# Altium PCB bidirectional_audio_v4.1.PcbDoc
Units mil, origin at the board's own origin, x right, y up, seen from the top; angles counter-clockwise.
Board outline 1710.78 x 3107.8 mil, 4 copper layers (Top Layer, Mid-Layer 1, Mid-Layer 2, Bottom Layer), stack 57.4 mil thick; 106 components, 76 nets, 313 pads, 214 vias.
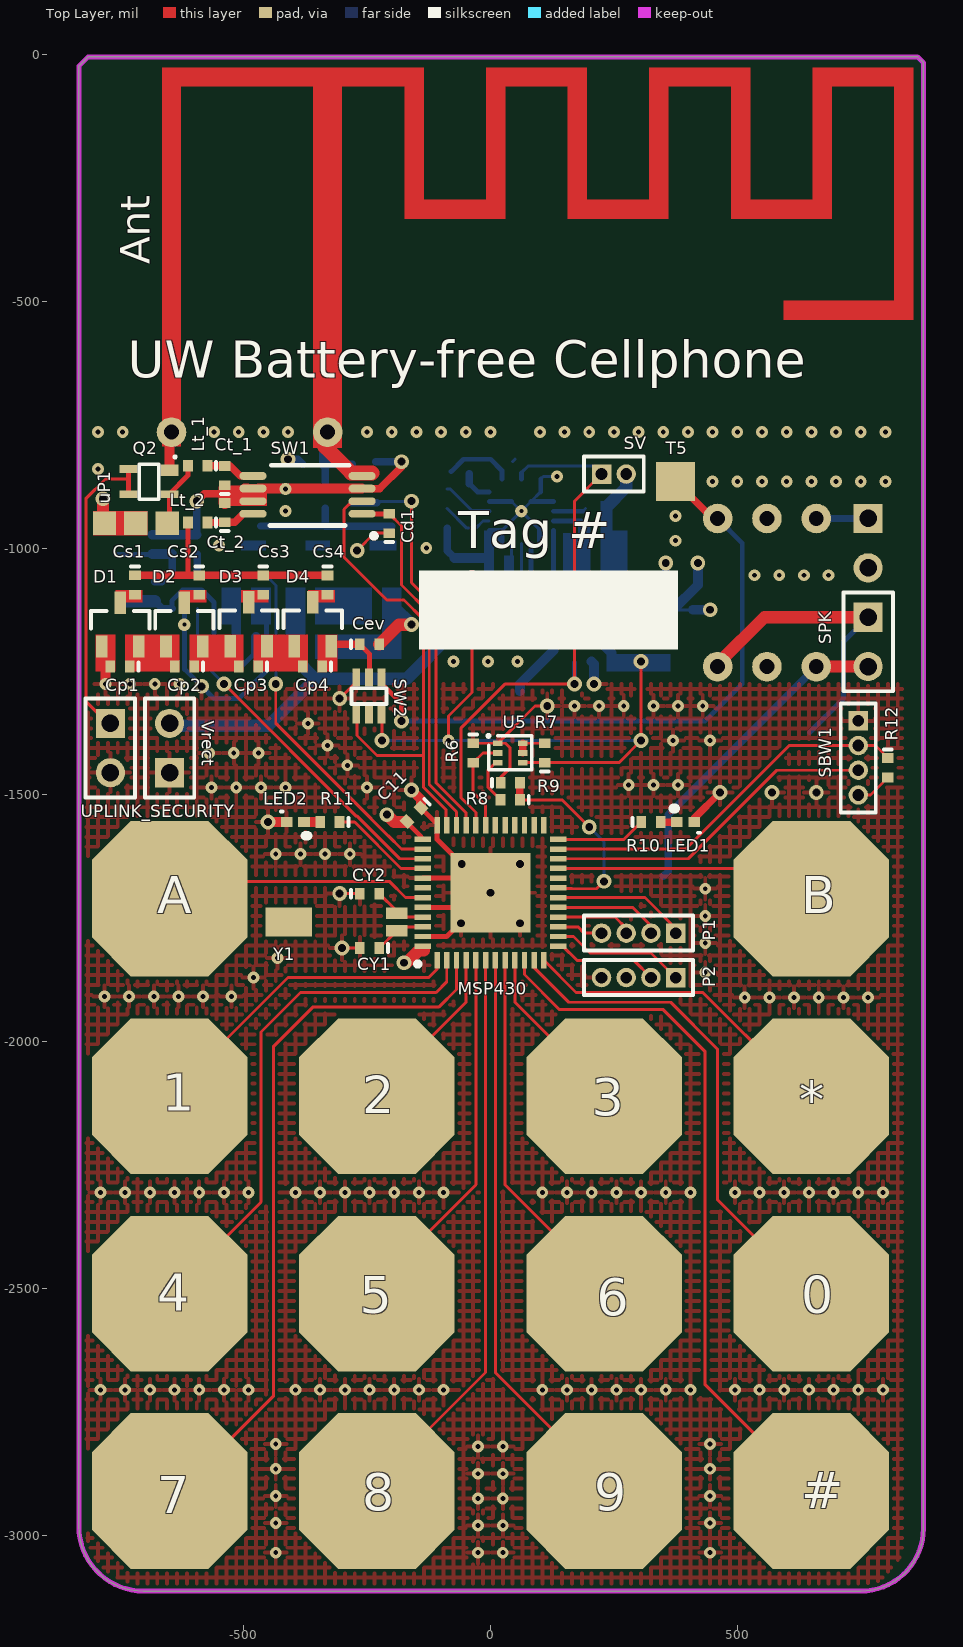
[diagram p0: Top Layer view]
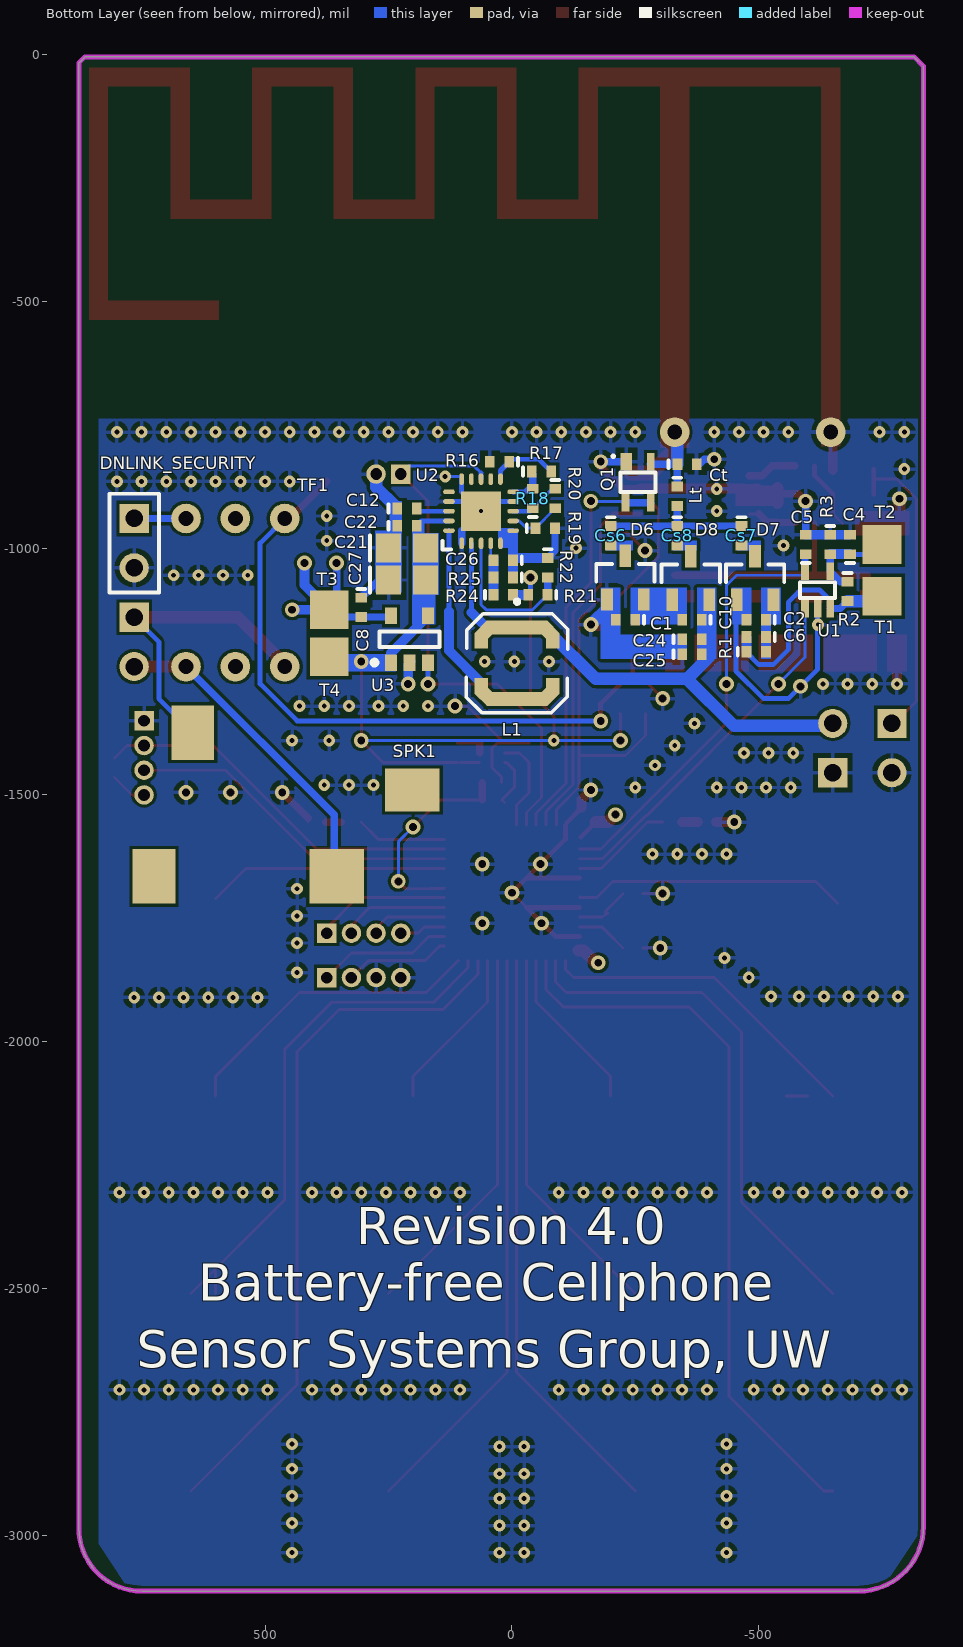
[diagram p1: Bottom Layer view, seen from below]
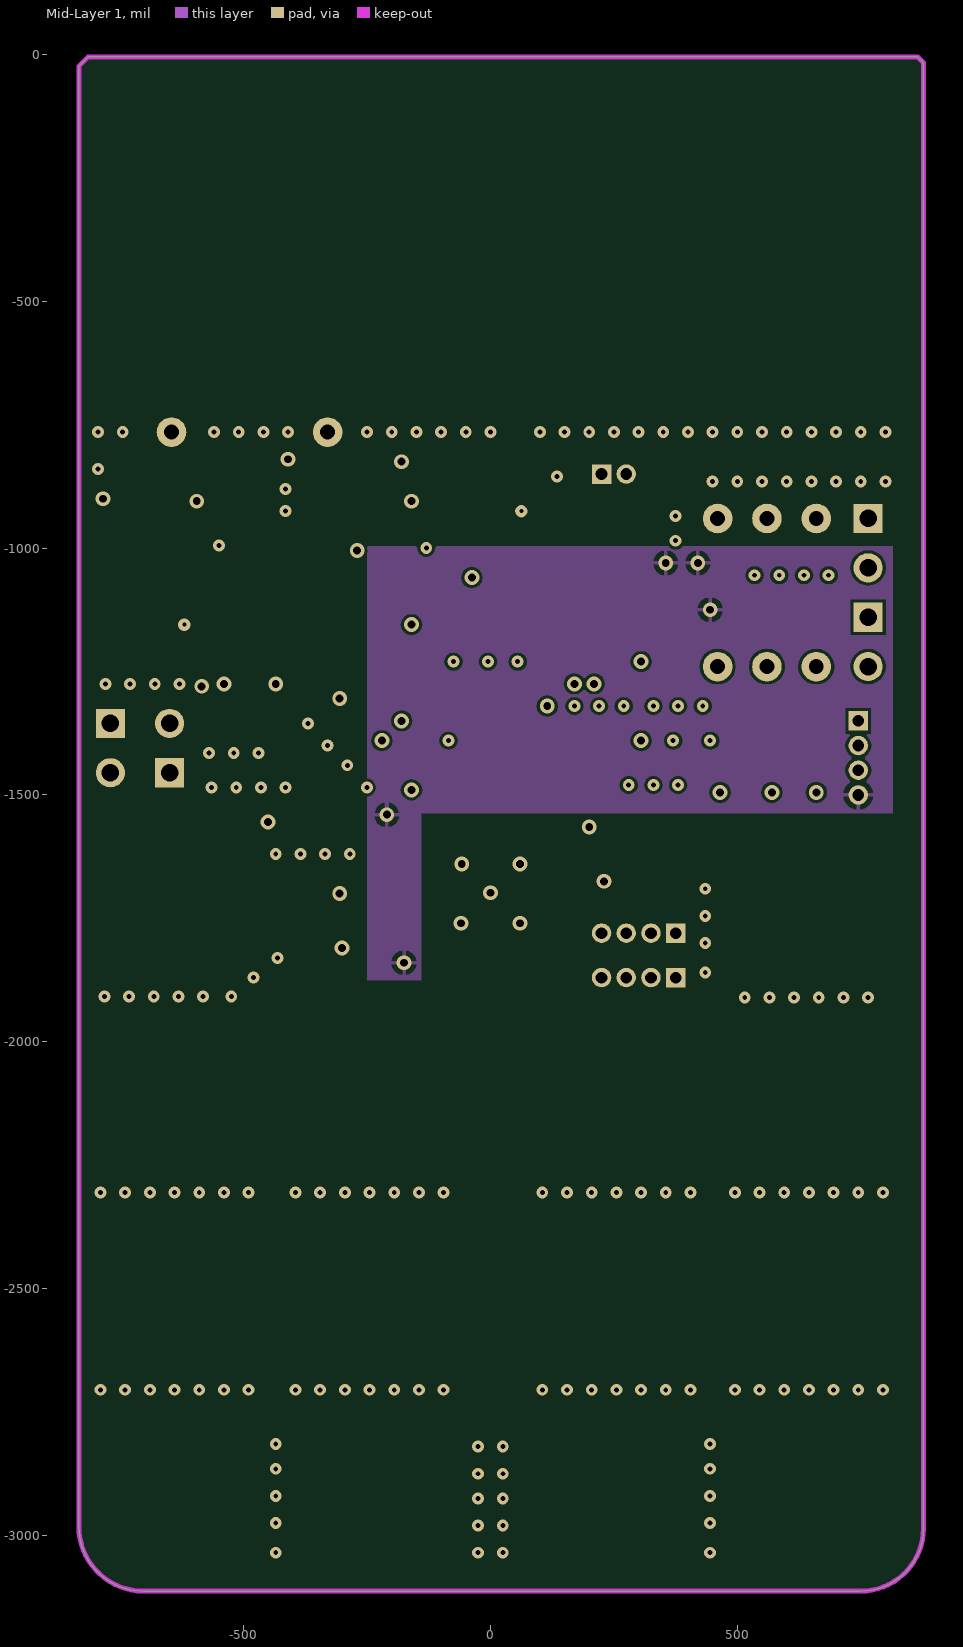
[diagram p2: Mid-Layer 1]
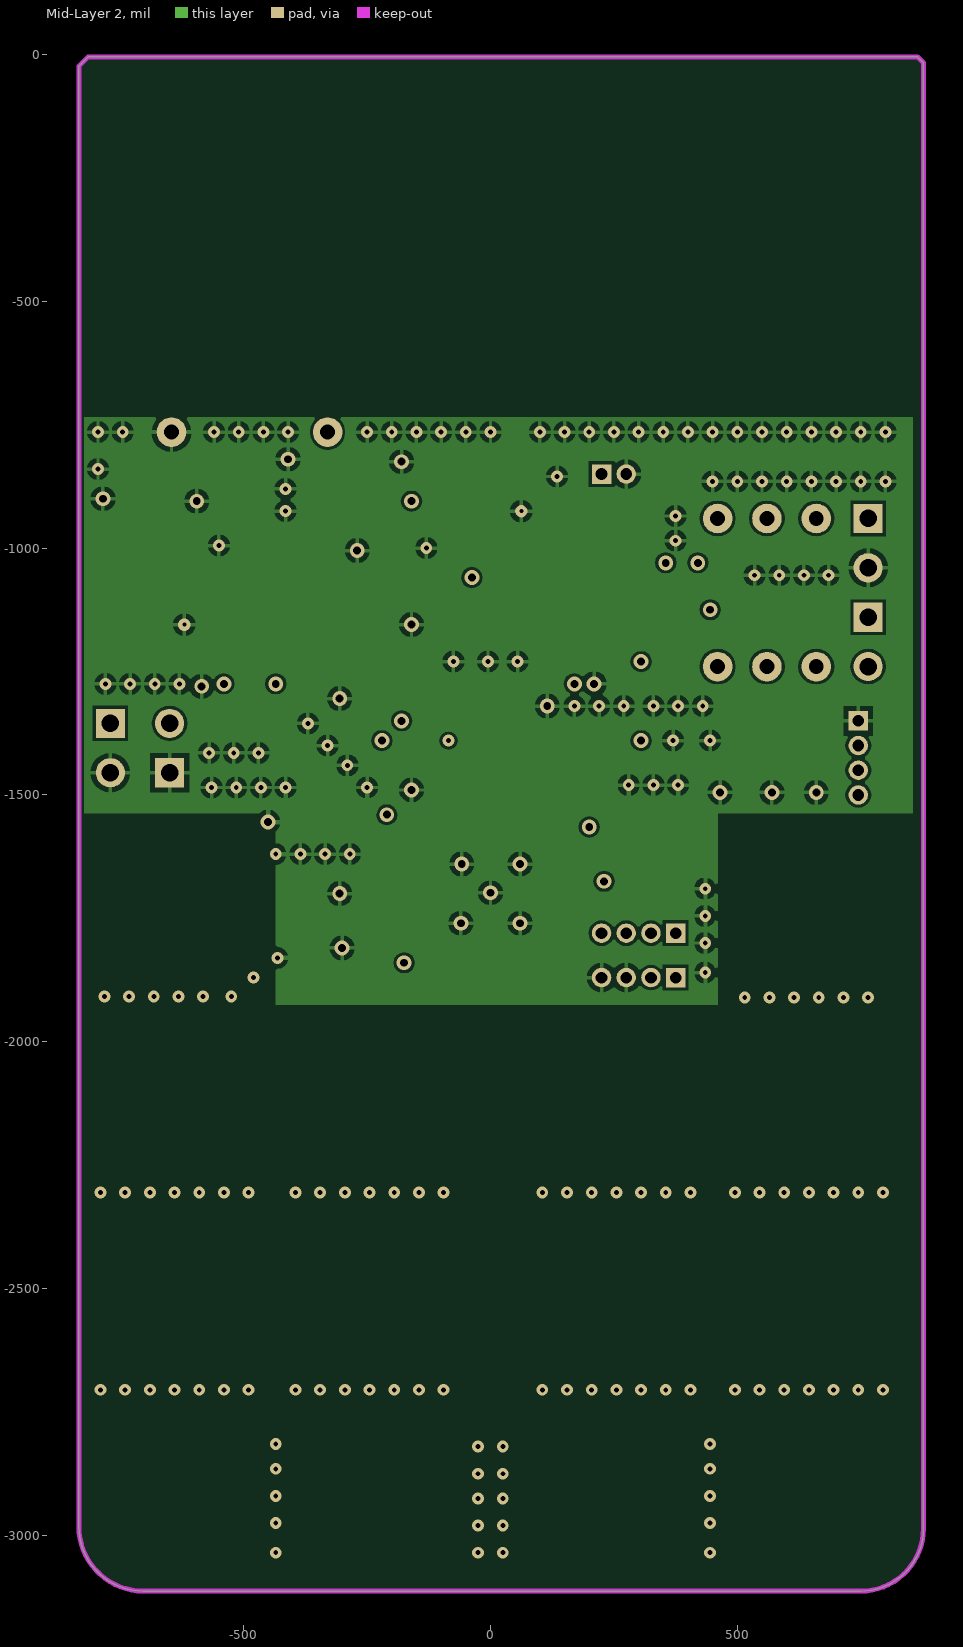
[diagram p3: Mid-Layer 2]

## Layer stack, top to bottom
Top Layer: signal copper 1.4
Dielectric: core 11.9, FR-4, Dk 4.8
Mid-Layer 1: signal copper 1.4
Dielectric: prepreg 28, FR-4, Dk 4.8
Mid-Layer 2: signal copper 1.4
Dielectric: core 11.9, FR-4, Dk 4.8
Bottom Layer: signal copper 1.4

## Board outline
-833.75,-2982.13 -833.75,-23.75 -815,-5 865,-5 877.03,-17.03 877.03,-2985.76 cw(c750,-2985.76) 750,-3112.8 -703.08,-3112.8 cw(c-703.08,-2982.13)

## Design rules (kind name [scope] priority, off if disabled: settings)
Clearance "Clearance~Sunstone Circuits" [All] p1: gap=6 // Sunstone Circuits Minimum Clearance Rule (MLB~4&6 Layer Designs)
HoleSize "HoleSize~Sunstone Circuits" [All] p1: absolutevalues=TRUE maxlimit=251 minlimit=8 maxpercent=80.000 minpercent=20.000 // Sunstone Circuits Hole Size Rule (MLB~4&6 Layer Designs)
HoleSize Testpoint [All] p2: absolutevalues=TRUE maxlimit=100 minlimit=1 maxpercent=80.000 minpercent=20.000
HoleSize TestPointUsage [All] p3: absolutevalues=TRUE maxlimit=100 minlimit=1 maxpercent=80.000 minpercent=20.000
MinimumAnnularRing "MinimumAnnularRing~Sunstone Circuits" [All] p1: minimumring=7 // Sunstone Circuits Minimum Annular Ring (MLB~4&6 Layer Designs)
MinimumSolderMaskSliver [All] p1: minsoldermaskwidth=0
PlaneClearance "PlaneClearance~Sunstone Circuits" [All] p1: clearance=12 // Sunstone Circuits Power Plane Clearance Rule (MLB~4&6 Layer Designs)
PlaneConnect "PlaneConnect~Sunstone Circuits" [All] p1: planeconnectstyle=Relief reliefexpansion=10 reliefentries=4 reliefconductorwidth=8 reliefairgap=10 // Sunstone Circuits Power Plane Connect Rule (MLB~4&6 Layer Designs)
PolygonConnect "PolygonConnect~Sunstone Circuits" [All] p1: connectstyle=Relief reliefconductorwidth=8 reliefentries=4 polygonreliefangle="90 Angle" airgapwidth=10 // Sunstone Circuits Polygon Connect Style (MLB~4&6 Layer Designs)
RoutingVias "RoutingVias~Sunstone Circuits" [All] p1: holewidth=16 width=30 viastyle="Through Hole" minholewidth=8 minwidth=24 maxholewidth=20 maxwidth=40 // Sunstone Circuits Routing Vias Rule (MLB~4&6 Layer Designs)
ShortCircuit "ShortCircuit~Sunstone Circuits" [All] p1: allowed=FALSE // Sunstone Circuits Short Circuit Rule~Do Not Allow (MLB~4&6 Layer Designs)
SilkToSilkClearance [All] p1: silktosilkclearance=6
SolderMaskExpansion "SolderMaskExpansion~Sunstone Circuits" [All] p1: expansion=3 // Sunstone Circuits Solder Mask Expansion Rule (MLB~4&6 Layer Designs)
ViasUnderSMD "ViasUnderSMD~Sunstone Circuits" [All] p1: allowed=FALSE // Sunstone Circuits Vias Under SMD~Do Not Allow (MLB~4&6 Layer Designs)
Width "Width~Sunstone Circuits" [All] p1: maxlimit=100 minlimit=6 preferedwidth=10 // Sunstone Circuits Minimum Width Rule (MLB~4&6 Layer Designs)
22 further rules are at their usual default settings.

## Classes and differential pairs
component class bidirectional_audio_v4.0_AFE: Ant C1 C2 C4 C5 C6 C8 C10 C12 C21 C22 C24 C25 C26 C27 Cd1 Cev Cp1 Cp2 Cp3 Cp4 Cs1 Cs2 Cs3 Cs4 Cs6 Cs7 Cs8 Ct Ct_1 Ct_2 D1 D2 D3 D4 D6 D7 D8 DNLINK_SECURITY L1 Lt Lt_1 Lt_2 Q1 Q2 R1 R2 R3 R16 R17 R18 R19 R20 R21 R22 R24 R25 SPK SPK1 SW1 SW2 T1 T2 T3 T4 T5 TF1 U1 U2 U3 uP1 UPLINK_SECURITY Vrect
component class bidirectional_audio_v4.0_Digital: 0 1 2 3 4 5 6 7 8 9 # * A B C11 CY1 CY2 LED1 LED2 MSP430 P1 P2 R6 R7 R8 R9 R10 R11 R12 SBW1 SV U5 Y1

## Components (designator, comment, footprint, x,y, rotation, side; value= is the part's Value field where it differs from the comment)
0 "Cap touch" CAPTOUCH-8mm#1 540,-2510 r90 top
1 "Cap touch" CAPTOUCH-8mm#2 -660,-2110 r90 top
2 "Cap touch" CAPTOUCH-8mm#3 -260,-2110 r90 top
3 "Cap touch" CAPTOUCH-8mm#4 140,-2110 r90 top
4 "Cap touch" CAPTOUCH-8mm#2 -660,-2510 r90 top
5 "Cap touch" CAPTOUCH-8mm#3 -260,-2510 r90 top
6 "Cap touch" CAPTOUCH-8mm#4 140,-2510 r90 top
7 "Cap touch" CAPTOUCH-8mm#2 -660,-2910 r90 top
8 "Cap touch" CAPTOUCH-8mm#3 -260,-2910 r90 top
9 "Cap touch" CAPTOUCH-8mm#5 140,-2910 r0 top
# "Cap touch" CAPTOUCH-8mm#1 540,-2910 r90 top
* "Cap touch" CAPTOUCH-8mm#1 540,-2110 r90 top
A "Cap touch" CAPTOUCH-8mm#6 -500,-1755 r90 top
Ant "ANT" PIFA_915MHZ -282.76,-797.68 r0 top net-tie
B "Cap touch" CAPTOUCH-8mm#7 445,-1795 r90 top
C1 "Cp_rect" 0402 -230.04,-1145 r0 bottom
C2 "Cdemod_1" 0402 -495.04,-1145 r0 bottom
C4 "Cdemod_2" 0402 -685.04,-992.66 r90 bottom
C5 "Decap_rx" 0402 -595.04,-992.66 r90 bottom
C6 "Cdemod_3" 0402 -495.04,-1180 r0 bottom
C8 "Cout_LDO" 0402 305,-1120 r270 bottom
C10 "Cp_rect" 0402 -365.04,-1145 r0 bottom
C11 "Cdecap_MSP" 0402 -155,-1540 r225 top
C12 "Cbat" 0402 212.36,-919.68 r180 bottom
C21 "Cstore" 0805-W 212.36,-999.68 r180 bottom
C22 "Cstore" 0402 212.36,-954.68 r180 bottom
C24 "Cin_boost1" 0402 -365.04,-1185 r180 bottom
C25 "Cin_boost2" 0402 -365.04,-1215 r180 bottom
C26 "Cref" 0402 17.36,-1024.68 r0 bottom
C27 "Cstore2" 0805-W 212.36,-1064.68 r180 bottom
Cd1 "Decap_SW" 0402 -205,-950 r90 top
Cev "Cout_env" 0402 -245,-1195 r0 top
Cp1 "Cp_env" 0402 -750.31,-1240 r180 top
Cp2 "Cp_env" 0402 -620,-1240 r180 top
Cp3 "Cp_env" 0402 -490,-1240 r180 top
Cp4 "Cp_env" 0402 -360.31,-1240 r180 top
Cs1 "Cs_env" 0402 -720,-1074.68 r270 top
Cs2 "Cs_env" 0402 -590,-1075 r270 top
Cs3 "Cs_env" 0402 -460,-1075 r270 top
Cs4 "Cs_env" 0402 -330,-1075 r270 top
Cs6 "Cs_rect" 0402 -200.04,-975 r270 bottom
Cs7 "Cs_rx" 0402 -465.04,-975 r270 bottom
Cs8 "Cs_rect" 0402 -335.04,-975 r270 bottom
Ct "C_Ant_tune" 0402 -355.04,-830 r180 bottom
Ct_1 "Cap" 0402 -538.06,-853.2 r90 top
Ct_2 "Cap" 0402 -538.06,-928.2 r90 top
CY1 "Cdecap_MSP" 0402 -245,-1810 r180 top
CY2 "Cdecap_MSP" 0402 -245,-1700 r0 top
D1 "SMS7630-005" "SOT23 - N" -750,-1155 r90 top
D2 "SMS7630-005" "SOT23 - N" -620,-1155 r90 top
D3 "SMS7630-005" "SOT23 - N" -490,-1154.29 r90 top
D4 "SMS7630-005" "SOT23 - N" -360,-1154.29 r90 top
D6 "SMS7630-005" "SOT23 - N" -230.04,-1060 r90 bottom
D7 "SMS7630-005" "SOT23 - N" -492.64,-1060.71 r90 bottom
D8 "SMS7630-005" "SOT23 - N" -362.44,-1060.71 r90 bottom
DNLINK_SECURITY "Header 2" HDR1X2 765,-940 r270 bottom
L1 "Ind_LPS4018" LPS4018 -15.04,-1225 r180 bottom
LED1 "LED" "Diode - 0402" 395,-1555 r180 top
LED2 "LED" "Diode - 0402" -395.31,-1555 r0 top
Lt "L_Ant_tune" 0402 -335.04,-895 r270 bottom
Lt_1 "Ind" 0402 -593.06,-833.2 r180 top
Lt_2 "Ind" 0402 -593.06,-948.2 r180 top
MSP430 "MSP430 Wolverine 48-Pin" MSP_QFN48_RGZ_PAD0 0,-1698.19 r90 top
P1 "MHDR1X4" MHDR1X4 375,-1780 r180 top
P2 "MHDR1X4" MHDR1X4 375,-1870 r180 top
Q1 "BF1101WR" SOT343R -255.04,-865 r0 bottom
Q2 "BF1101WR" SOT343R -690,-865 r90 top
R1 "Res_demod1" 0402 -495.04,-1210 r180 bottom
R2 "Res_demod2" 0402 -680.04,-1087.66 r270 bottom
R3 "Res_demod3" 0402 -645.04,-992.66 r270 bottom
R6 "Res_HSS" 0402 -35,-1415 r270 top
R7 "Res_HSS" 0402 110,-1415 r90 top
R8 "Res_HSS" 0402 40,-1510 r180 top
R9 "Res_HSS" 0402 40.31,-1475 r0 top
R10 "Res_LED" 0402 325.31,-1555 r0 top
R11 "Res_LED" 0402 -325.31,-1555 r180 top
R12 "Res_flash" 0402 805,-1445 r270 top
R16 "Rok1" 0402 24.96,-825 r0 bottom
R17 "Rok2" 0402 -60.04,-845 r180 bottom
R18 "Rok3" 0402 -42.64,-899.68 r90 bottom
R19 "Rov1" 0402 -67.64,-959.68 r180 bottom
R20 "Rov2" 0402 -87.64,-899.68 r270 bottom
R21 "R_80%" 0402 -52.64,-1094.68 r0 bottom
R22 "R_50%" 0402 -72.64,-1039.68 r270 bottom
R24 "Res_MPPTfixed" 0402 17.36,-1094.68 r180 bottom
R25 "Res_MPPTfixed" 0402 17.36,-1059.68 r0 bottom
SBW1 "MHDR1X4" MHDR1X4 745,-1350 r270 top
SPK "Header 2" HDR1X2 765,-1140 r270 top
SPK1 "Headphone jack" CONN_JACK 725,-1665 r180 bottom
SV "MHDR1X2" MHDR1X2 225,-850 r0 top
SW1 "ADG919" MSOP_8pin -373.06,-893.2 r180 top
SW2 "ADG841" SC70-6 -245,-1300 r180 top
T1 "Test Point SMT" SMT_TESTPOINT_2MM -750.04,-1097.66 r180 bottom
T2 "Test Point SMT" SMT_TESTPOINT_2MM -750.04,-992.66 r180 bottom
T3 "Test Point SMT" SMT_TESTPOINT_2MM 370,-1125 r0 bottom
T4 "Test Point SMT" SMT_TESTPOINT_2MM 370,-1220 r0 bottom
T5 "Test Point SMT" SMT_TESTPOINT_2MM 375,-865 r0 top
TF1 "Audio_TF" AUDIO_TF 660,-940 r270 bottom
U1 "Comparator" SC70-5 -619.45,-1085.06 r180 bottom
U2 "BQ25570" BQ25570 62.4,-925.32 r90 bottom
U3 "TPS780270200DDCT" TI-DDC5_L 207.36,-1184.68 r90 bottom
U5 "SI1016X" "SC-89-6 Vishay" 40,-1415 r0 top
uP1 "Electret Microphone" UP_23024 -718.39,-950 r0 top
UPLINK_SECURITY "Header 2" HDR1X2 -770,-1355 r270 top
Vrect "Header 2" HDR1X2 -650,-1455 r90 top
Y1 "32khz_tuning_fork_crystal" CRYSTAL_TUNING_FORK_32KHZ -286.46,-1757.28 r0 top

## Footprints (in the part's own frame and the unit in brackets; to place one, negate y for a bottom-side part, rotate by r counter-clockwise, add the part's x,y. Pads: shape width x height; smd on the part's side, far side on the other; paste and mask are expansions set on the pad)
0402 [mm] "Surface Mount; Body 1 x 0.5 mm (LxW typ)"
  rect 0.5x0.6 smd: 1(-0.5,0) 2(0.5,0)
  silkscreen extent -0.95,-0.2 -0.95,0.2, body extent -0.5,-0.25 0.5,0.25, height 0.5
0805-W [mm] "Surface Mount - Wide; Body 2.0 x 1.25 mm (LxW typ)"
  rect 1.3x1.5 smd: 1(-0.95,0) 2(0.95,0)
  silkscreen extent -1.9,-0.65 -1.9,0.65, body extent -1,-0.62 1,0.63, height 1.25
AUDIO_TF [mil] "Audio Transformer Triad"
  round 60 hole 30: 1(0,0) 2(0,100) 3(0,200) 4(300,200) 5(300,100) 6(300,0)
  body extent -30,-35 330,235, height 100
BQ25570 [mm] "Boost Charger"
  oval 0.6x0.24 smd paste-0.025 mask+0.07: 1(-1.65,1) 2(-1.65,0.5) 3(-1.65,0) 4(-1.65,-0.5) 5(-1.65,-1) 11(1.65,-1) 12(1.65,-0.5) 13(1.65,0) 14(1.65,0.5) 15(1.65,1)
  oval 0.24x0.6 smd paste-0.025 mask+0.07: 6(-1,-1.65) 7(-0.5,-1.65) 8(0,-1.65) 9(0.5,-1.65) 10(1,-1.65) 16(1,1.65) 17(0.5,1.65) 18(0,1.65) 19(-0.5,1.65) 20(-1,1.65)
  round 0.635 hole 0.203: 21(0,0)
  rect 2.05x2.05 smd: 21(0,0)
  silkscreen extent -1.97,1.54 -1.54,1.98, body extent -1.82,-1.82 1.83,1.83, height 1.01
CAPTOUCH-8mm#1 [mil]
  oct 315x315 smd: 1(0,-110)
CAPTOUCH-8mm#2 [mil]
  oct 315x315 smd: 1(0,-10)
CAPTOUCH-8mm#3 [mil]
  oct 315x315 smd: 1(0,-30)
CAPTOUCH-8mm#4 [mil]
  oct 315x315 smd: 1(0,-90)
CAPTOUCH-8mm#5 [mil]
  oct 315x315 smd: 1(90,0)
CAPTOUCH-8mm#6 [mil]
  oct 315x315 smd: 1(45,150)
CAPTOUCH-8mm#7 [mil]
  oct 315x315 smd: 1(85,-205)
CONN_JACK [mm] "PCB footprint for the headphone jack"
  rect 2.2x2.8 smd: 1(0,0) 3(2,7.4)
  rect 2.8x2.8 smd: 2(9.4,0)
  rect 2.8x2.2 smd: 4(13.3,4.45)
CRYSTAL_TUNING_FORK_32KHZ [mm]
  rect 1.1x0.6 smd: 1(2.45,0.45) 2(2.45,-0.45)
  rect 2.4x1.5 smd: ""(-3.1,0)
"Diode - 0402" [mm] "Diode: Body 1.6 x 0.8 mm (LxW typ)"
  rect 0.6x0.5 smd: 1(0.45,0) 2(-0.45,0)
  silkscreen extent -0.75,-0.7 0.63,0.55
HDR1X2 [mm] "Connector; Header; 2 Position"
  rect 1.5x1.5 hole 0.9: 1(0,0)
  round 1.5 hole 0.9: 2(2.54,0)
  silkscreen extent -1.27,-1.27 3.81,1.27
LPS4018 [mil] "Inductor"
  rect 28x31.5 smd: 1(-77.03,37.61) 1(67.97,37.61) 2(-77.03,-54.39) 2(67.97,-54.39)
  rect 35.5x28 smd rot 45: 1(-68.53,55.61) 2(59.47,-72.39)
  rect 123x28 smd: 1(-4.53,64.11) 2(-4.53,-80.89)
  rect 35.5x28 smd rot 135: 1(59.47,55.61) 2(-68.03,-72.89)
  silkscreen extent -107,-109 98,120, body extent -85,-89 76,72, height 71
MHDR1X2 [mm] "Connector; Header; 2 Position"
  rect 1x1 hole 0.6: 1(0,0)
  round 1 hole 0.6: 2(1.27,0)
  silkscreen extent -0.9,-0.9 2.17,0.9
MHDR1X4 [mm] "Connector; Header; 4 Position"
  rect 1x1 hole 0.6: 1(0,0)
  round 1 hole 0.6: 2(1.27,0) 3(2.54,0) 4(3.81,0)
  silkscreen extent -0.9,-0.9 4.71,0.9
MSOP_8pin [mm]
  oval 1.4x0.4 smd: 1(-2.872,0.95) 2(-2.872,0.3) 3(-2.872,-0.35) 4(-2.87,-1.001) 5(2.745,-1) 6(2.745,-0.35) 7(2.745,0.3) 8(2.745,0.95)
  silkscreen extent -3.6,-1.55 1.88,2.21
MSP_QFN48_RGZ_PAD0 [mm]
  rect 4.1x4.1 smd: 0(0,0)
  rect 0.85x0.28 smd: 1(-3.475,2.75) 2(-3.475,2.25) 3(-3.475,1.75) 4(-3.475,1.25) 5(-3.475,0.75) 6(-3.475,0.25) 7(-3.475,-0.25) 8(-3.475,-0.75) 9(-3.475,-1.25) 10(-3.475,-1.75) 11(-3.475,-2.25) 12(-3.475,-2.75) 25(3.475,-2.75) 26(3.475,-2.25) 27(3.475,-1.75) 28(3.475,-1.25) 29(3.475,-0.75) 30(3.475,-0.25) 31(3.475,0.25) 32(3.475,0.75) 33(3.475,1.25) 34(3.475,1.75) 35(3.475,2.25) 36(3.475,2.75)
  rect 0.28x0.85 smd: 13(-2.75,-3.475) 14(-2.25,-3.475) 15(-1.75,-3.475) 16(-1.25,-3.475) 17(-0.75,-3.475) 18(-0.25,-3.475) 19(0.25,-3.475) 20(0.75,-3.475) 21(1.25,-3.475) 22(1.75,-3.475) 23(2.25,-3.475) 24(2.75,-3.475) 37(2.75,3.475) 38(2.25,3.475) 39(1.75,3.475) 40(1.25,3.475) 41(0.75,3.475) 42(0.25,3.475) 43(-0.25,3.475) 44(-0.75,3.475) 45(-1.25,3.475) 46(-1.75,3.475) 47(-2.25,3.475) 48(-2.75,3.475)
  silkscreen extent -3.78,3.63 -3.55,3.85, body extent -3.3,-3.3 3.3,3.3, height 1
PIFA_915MHZ [mil]
  round 60 hole 30: 1(-47.24,32.68) 2(-363.39,32.68)
  Top Layer region: -17.72,732.28 147.64,732.28 147.64,771.65 -17.72,771.65
  Top Layer region: 147.64,771.65 108.27,771.65 108.27,503.94 147.64,503.94
  Top Layer region: 108.27,464.57 312.99,464.57 312.99,503.94 108.27,503.94
  Top Layer region: 273.62,503.94 312.99,503.94 312.99,771.65 273.62,771.65
  Top Layer region: 273.62,732.28 478.35,732.28 478.35,771.65 273.62,771.65
  Top Layer region: 438.98,503.94 478.35,503.94 478.35,771.65 438.98,771.65
  Top Layer region: 438.98,464.57 643.7,464.57 643.7,503.94 438.98,503.94
  Top Layer region: 604.33,503.94 643.7,503.94 643.7,771.65 604.33,771.65
  Top Layer region: 604.33,732.28 809.06,732.28 809.06,771.65 604.33,771.65
  Top Layer region: 769.68,503.94 809.06,503.94 809.06,771.65 769.68,771.65
  Top Layer region: 769.68,464.57 974.41,464.57 974.41,503.94 769.68,503.94
  Top Layer region: 935.04,503.94 974.41,503.94 974.41,771.65 935.04,771.65
  Top Layer region: 875.98,259.84 1100.39,259.84 1100.39,299.21 875.98,299.21
  Top Layer region: 1100.39,259.84 1139.76,259.84 1139.76,732.28 1100.39,732.28
  Top Layer region: 935.04,732.28 1139.76,732.28 1139.76,771.65 935.04,771.65
  Top Layer region: -76.77,0 -17.72,0 -17.72,732.28 -76.77,732.28
  Top Layer region: -343.7,732.28 -17.72,732.28 -17.72,771.65 -343.7,771.65
  Top Layer region: -383.07,3.94 -343.7,3.94 -343.7,771.65 -383.07,771.65
SC70-5 [mm] "SC70-5"
  rect 0.4x0.92 smd: 1(-0.65,-0.95) 2(0,-0.95) 3(0.65,-0.95) 4(0.65,0.95) 5(-0.65,0.95)
  silkscreen extent -0.9,-0.4 0.9,0.4
SC70-6 [mm] "Audio Switch"
  rect 0.4x0.92 smd: 1(-0.616,-0.957) 2(0.034,-0.957) 3(0.684,-0.957) 4(0.684,0.943) 5(0.034,0.943) 6(-0.616,0.943)
  silkscreen extent -0.87,-0.41 0.93,0.39
"SC-89-6 Vishay" [mm]
  rect 0.478x0.3 smd: 1(-0.638,0.5) 2(-0.638,0) 3(-0.638,-0.5) 4(0.638,-0.5) 5(0.638,0) 6(0.638,0.5)
  silkscreen extent -1.15,-0.87 1.11,0.91
SMT_TESTPOINT_2MM [mm]
  rect 2x2 smd: 1(0,0)
"SOT23 - N" [mm] "SOT23, 3-Leads, Body 2.9x1.3mm, Pitch 0.95mm, Lead Span 2.3mm - Reverse Pinning, IPC Medium Density"
  rect 1.15x0.6 smd: 1(-1.125,0.95) 2(-1.125,-0.95) 3(1.125,0)
  silkscreen extent -0.2,-1.5 0.7,1.5, body extent -0.7,-1.5 0.7,1.5, height 1.1
SOT343R [mm] "SOT343R - Package for BF1101WR"
  rect 0.6x0.92 smd: 1(0.584,-1.016)
  rect 0.4x0.92 smd: 2(-0.664,-1.007) 3(-0.664,1.093) 3(0.636,1.093)
  silkscreen extent -0.91,-1.3 1.27,0.54
TI-DDC5_L [mm] "SOT23, 5-Leads, Body 2.9x1.6mm, Pitch 0.95mm, IPC High Density"
  rect 0.85x0.6 smd: 1(-1.2,0.95) 2(-1.2,0) 3(-1.2,-0.95) 4(1.2,-0.95) 5(1.2,0.95)
  silkscreen extent -1.32,-1.55 0.4,1.93, body extent -0.87,-1.52 0.87,1.53, height 1.1
UP_23024 [mm]
  rect 1.2x1.2 smd: 1(-1.61,0.01) 2(0,0) 3(1.61,0)

## Part data
0 1 2 3 4 5 6 7 8 9 # * A B: "Cap Touch Buttons"
C1 C2 C4 C5 C6 C8 C10 C11 C12 C21 C22 C24 C25 C26 C27 Cev Cp1 Cp2 Cp3 Cp4 Cs1 Cs2 Cs3 Cs4 Cs6 Cs7 Cs8 Ct CY1 CY2: library part Cap, "Ceramic Capacitor (Surface Mount)"
Cd1: library part Ceramic_Chip_Capacitor, "Ceramic Capacitor - Standard"
Ct_1 Ct_2: "Ceramic Capacitor (Surface Mount)"
D1 D2 D3 D4 D6 D7 D8: "Agilent Schottky Diode, Two in Series, Small Package SOT-323"
DNLINK_SECURITY SPK SV UPLINK_SECURITY Vrect: "Header, 2-Pin"
L1 Lt_1 Lt_2: "Inductor (Surface Mount)"
LED1 LED2: library part "Diode - picoLED", "Typical RED, GREEN, YELLOW, AMBER GaAs LED"
Lt: library part Ind, "Inductor (Surface Mount)"
MSP430: library part MSP430FR596X_586X_RGZ, "16-bit FRAM MCU"
P1 P2 SBW1: "Header, 4-Pin"
Q1 Q2: "N-Channel Dual-Gate Mos-Fets MOSFET, SOT343R"
R1 R2 R3 R6 R7 R8 R9 R10 R11 R12 R16 R17 R18 R19 R20 R21 R22 R24 R25: library part Res, "Chip Resistor (Surface Mount)"
SPK1: library part CONN_JACK
SW1: "RF 2:1 MUX/SPDT Reflective"
SW2: "Audio Switch"
T1 T2 T3 T4 T5: "Test Point, Flat Pad"
TF1: "Audio Transformer by Triad"
U1: library part NCS2200, "Comparator: On Semi 10uA Comparator"
U2: "Boost Charger"
U3: library part CMP-0394-01119-1, "Single Output LDO, 150 mA, Adjustable 1.22 to 5.25 V Output, 2.2 to 5.5 V Input, with 500 nA Quiescent Current, 5-pin SOT (DDC), -40 to 125 degC, Green (RoHS & no Sb/Br)"
U5: "NMOS and PMOS array"
uP1: library part UP_Knowles_23024
Y1: "32 khz crystal"

## Via types
v1: diameter 24, hole 10, Top Layer to Bottom Layer, tented both sides, 174 vias
v2: diameter 30, hole 16, Top Layer to Bottom Layer, tented both sides, 24 vias
v3: diameter 30, hole 16, Top Layer to Bottom Layer, 14 vias
v4: diameter 25, hole 8, Top Layer to Bottom Layer, tented both sides, 1 vias
v5: diameter 24, hole 10, Top Layer to Bottom Layer, 1 vias

## Nets (pads, with @x,y where several pads share a name; then routed paths per layer and width w, separated by ;. In a path a pad name is that pad's centre, name@x,y a point inside that pad or via, vN(x,y) a via of type N, cw(c..) or ccw(c..) an arc to the next point about the centre after c; other vN are vias at no path point)
AN_EN: Cd1.2 MSP430.34 SW1.1 | length 742.5
  Top Layer w6: Cd1.2@-205.04,-930.59 Cd1.2@-205,-930.63 ; Cd1.2 -180,-955.31 -180,-1075 -124.04,-1130.96 -124.04,-1478.99 -68.9,-1534.13 MSP430.34
  Top Layer w10: SW1.1 Cd1.2@-205.04,-930.59
ANT: Ant.1 Ct.1 Lt.1 Q1.2 SW1.4 | length 323.6
  Top Layer w30: Ant.1@-335,-761.85 -335,-795 -282.3,-847.7 SW1.4@-240,-847.7
  Bottom Layer w6: Ct.1 Ct.1@-335.04,-830 ; Ant.1@-335.35,-762.2 Ant.1@-335,-761.85
  Bottom Layer w15: Lt.1 Ct.1@-335.04,-830 ; Ct.1@-335.04,-825.32 Ct.1@-335.04,-830 ; Q1.2@-280.04,-830 Ct.1@-335.04,-830
  Bottom Layer w25: Ct.1 Ant.1@-335.35,-762.2
AUDIO_NEG: SPK1.2 SPK.2 TF1.6 | length 658.4
  Top Layer w25: TF1.6 SPK.2
  Bottom Layer w15: SPK1.2@350,-1665 360,-1655 360,-1540 TF1.6
AUDIO_OUT: SW2.1 T5.1 TF1.3 | length 1293.1
  Top Layer w6: TF1.3@450,-940 TF1.3
  Top Layer w10: SW2.1@-219.33,-1266.02 -219.33,-1275.67 -180,-1315 v3(-180,-1350)
  Top Layer w15: T5.1 TF1.3@450,-940
  Bottom Layer w10: v3(-180,-1350) -135,-1350 435,-1350 510,-1275 510,-990 TF1.3
AUDIO_POS: SPK1.3 SPK.1 TF1.4 | length 630.1
  Top Layer w25: TF1.4@465,-1240 465,-1230 555,-1140 SPK.1
  Bottom Layer w10: SPK1.3 715,-1304.92 715,-1190 SPK.1
DMD_N: C4.1 R2.1 R3.2 T2.1 U1.4 | length 233.9
  Bottom Layer w10: T2.1@-760.04,-1012.66 -645.35,-1012.66 R3.2
  Bottom Layer w15: R2.1 -665.35,-1067.97 U1.4 R3.2
  Bottom Layer w20: C4.1 R3.2
DNLINK_SR: DNLINK_SECURITY.1 TF1.1 | length 97.3
  Bottom Layer w15: TF1.1@665,-940 755.63,-940 DNLINK_SECURITY.1@760.31,-935.31
GND: Ant.2 C1.2 C2.2 C4.2 C5.2 C8.1 C11.1 C12.1 C21.1 C22.1 C24.1 C25.1 C26.1 C27.1 Cd1.1 Cev.2 Cp1.2 Ct.2 Ct_1.1 Ct_2.2 CY1.2 CY2.1 D1.1 D6.1 D7.1 DNLINK_SECURITY.2 LED1.2 LED2.2 MSP430.0 MSP430.36 MSP430.41 MSP430.44 MSP430.47 P2.3 P2.4 Q1.1 Q2.1 R3.1 R6.1 R9.1 R16.2 R19.2 R22.1 R25.1 SBW1.1 SV.2 SW1.3 SW1.6 SW1.7 SW2.3 U1.2 U2.1 U2.5 U2.6 U2.9 U2.15 U2.17 U2.21 U3.2 U5.1 uP1.1 uP1.2 UPLINK_SECURITY.2 Vrect.1 | length 3683.5
  Top Layer w6: D1.1 D1.1@-780,-1206.69 ; uP1.1@-785.04,-946.34 uP1.1 ; Ant.2@-655,-771.17 Ant.2@-650,-766.17 ; Ant.2@-647.99,-764.16 Ant.2@-647.99,-761.85 ; v2(-595.04,-905) v2@-590,-905 ; -538.06,-890 -485,-890 ; LED2.2@-413.11,-1554.92 LED2.2 ; v2(-305.51,-1699.92) -264.76,-1699.92 CY2.1 ; v2(-305.51,-1304.92) -270.51,-1269.92 SW2.3@-270.51,-1266.02 ; v2(-300.51,-1809.92) -300.43,-1810 CY1.2 ; v2(-270,-1005) -234.68,-969.68 Cd1.1 ; v2@-165,-1495 v2@-155,-1495 ; MSP430.36@-111.85,-1556.38 MSP430.36@-111.85,-1555.31 ; R6.1 U5.1 ; MSP430.0@-29.53,-1727.72 v3(0,-1698.19) MSP430.0@-29.53,-1668.66 ; R9.1 20.63,-1464.37 40,-1445 40,-1405 30.32,-1395.32 U5.1 ; v2(115,-1320) 90.2,-1320 U5.1 ; LED1.2 LED1.2@412.72,-1547.28
  Top Layer w10: C11.1 MSP430.36@-111.85,-1555.31 ; MSP430.47 -88.58,-1786.77 -29.53,-1727.72 MSP430.44 ; MSP430.41 MSP430.0@-29.53,-1668.66 ; MSP430.36 -108.27,-1589.92 v3(0,-1698.19)
  Top Layer w15: v2(-595.04,-905) -580.04,-890 -538.06,-890 ; SW1.3 -224.41,-879.41 -180.04,-835.04 v2(-180.04,-825) ; LED1.2@412.72,-1547.28 v2(465,-1495)
  Top Layer w20: v1(-780,-1275) D1.1@-780,-1206.69 ; Q2.1 Ant.2@-650,-766.17 ; SW1.6@-498.06,-879.41 -492.29,-879.41 -491.88,-879.82 -470.34,-879.82 -469.93,-879.41 SW1.3 ; v2(-450.51,-1554.92) LED2.2@-413.11,-1554.92 ; v2@-155,-1495 -141.08,-1508.92 C11.1
  Top Layer w25: uP1.1@-785.04,-946.34 v2(-785.04,-900) ; Ct_2.2 -538.06,-890 Ct_1.1@-538.06,-878.2 ; Cev.2 -185.31,-1155 v2(-160.04,-1155)
  Bottom Layer w6: -620.04,-972.97 -619.45,-973.56 ; C5.2 C5.2@-593.01,-975 ; D7.1 D7.1@-453.85,-1106.38 ; Ct.2@-380,-830 Ct.2 ; D6.1@-200.04,-1111.69 -196.34,-1107.99 D6.1@-196.34,-1118.7 ; C26.1@-7.01,-1020 C26.1 ; U2.21@23.03,-964.68 U2.21@62.4,-925.32 ; U2.21@42.72,-905.63 U2.21@62.4,-925.32 ; R16.2 R16.2@50,-819.65 ; U2.21@101.77,-964.69 U2.21@62.4,-925.32 ; U2.21@101.77,-885.94 82.09,-905.63 U2.21@62.4,-925.32 ; U2.15 107.13,-855 v1(135,-855) ; C12.1 C12.1@234.96,-916.77 ; C27.1 C27.1@269.37,-1064.68
  Bottom Layer w10: U1.2 -619.45,-1245.55 v2(-585,-1280) -560,-1305 -510,-1305 -453.85,-1248.85 D7.1@-453.85,-1106.38 ; U2.6 23.03,-964.68 U2.5 ; U2.9 U2.21@42.72,-905.63 ; U2.21@82.09,-905.63 U2.17 ; U2.21@101.77,-885.94 U2.15
  Bottom Layer w15: C5.2 v2(-595.04,-905) ; v2(-410,-820) -390,-820 Ct.2@-380,-830 ; Q1.1 v2(-180.04,-825) ; R19.2 -87.32,-1005.31 R22.1 ; U2.1 U2.21@101.77,-964.69 ; C27.1@269.37,-1064.68 C8.1
  Bottom Layer w20: C4.2 R3.1 -620.04,-972.97 C5.2 ; R22.1 C26.1@-7.01,-1020 ; U3.2@204.96,-1230 209.96,-1235 v2@209.96,-1270
  Bottom Layer w25: D6.1@-196.34,-1118.7 v2(-160.04,-1155) ; C12.1@234.96,-916.77 275,-876.73 SV.2
  other v1: -435,-3035 -25,-3035 25,-3035 445,-3035 -25,-2980 25,-2980 -435,-2975 445,-2975 -25,-2925 25,-2925 -435,-2920 445,-2920 -25,-2875 25,-2875 -435,-2865 445,-2865 -25,-2820 25,-2820 -435,-2815 445,-2815 -790,-2705 -740,-2705 -690,-2705 -640,-2705 -590,-2705 -540,-2705 -490,-2705 -395,-2705 -345,-2705 -295,-2705 -245,-2705 -195,-2705 -145,-2705 -95,-2705 105,-2705 155,-2705 205,-2705 255,-2705 305,-2705 355,-2705 405,-2705 495,-2705 545,-2705 595,-2705 645,-2705 695,-2705 745,-2705 795,-2705 -790,-2305 -740,-2305 -690,-2305 -640,-2305 -590,-2305 -540,-2305 -490,-2305 -395,-2305 -345,-2305 -295,-2305 -245,-2305 -195,-2305 -145,-2305 -95,-2305 105,-2305 155,-2305 205,-2305 255,-2305 305,-2305 355,-2305 405,-2305 495,-2305 545,-2305 595,-2305 645,-2305 695,-2305 745,-2305 795,-2305 515,-1910 565,-1910 615,-1910 665,-1910 715,-1910 765,-1910 -782,-1908 -732,-1908 -682,-1908 -632,-1908 -582,-1908 -525,-1908 -480,-1870 435,-1860 -431.09,-1830 435,-1800 435,-1745 435,-1690 -435,-1620 -385,-1620 -335,-1620 -285,-1620 -565,-1485 -515,-1485 -465,-1485 -415,-1485 -250,-1485 280,-1480 330,-1480 380,-1480 -290,-1440 -570,-1415 -520,-1415 -470,-1415 -330,-1400 370,-1390 445,-1390 -370,-1355 170,-1320 220,-1320 270,-1320 330,-1320 380,-1320 430,-1320 -730,-1275 -680,-1275 -630,-1275 -75,-1230 -5,-1230 55,-1230 535,-1055 585,-1055 635,-1055 685,-1055 -130,-1000 -550,-995 375,-985 375,-935 -415,-925 -415,-880 450,-865 500,-865 550,-865 600,-865 650,-865 700,-865 750,-865 800,-865 -795,-840 -795,-765 -745,-765 -560,-765 -510,-765 -460,-765 -410,-765 -250,-765 -200,-765 -150,-765 -100,-765 -50,-765 0,-765 100,-765 150,-765 200,-765 250,-765 300,-765 350,-765 400,-765 450,-765 500,-765 550,-765 600,-765 650,-765 700,-765 750,-765 800,-765
  other v2: -60,-1760 60,-1760 -58.19,-1640 60,-1640 570,-1495 660,-1495 -160,-1490 210,-1275
  other v4: -620,-1155
LED1: MSP430.24 R10.1 | length 183.3
  Top Layer w6: MSP430.24 270.71,-1589.92 R10.1
LED2: MSP430.40 R11.1 | length 209.2
  Top Layer w6: R11.1@-304.61,-1553.98 R11.1 -275,-1555 -181.02,-1648.98 MSP430.40
MEAS_EN: MSP430.31 R6.2 U5.2 | length 195.1
  Top Layer w6: MSP430.31 -9.84,-1520.16 -35,-1495 R6.2 -15.31,-1415 U5.2
NetC1_1: C1.1 C10.2 D6.2 D8.1
NetC2_1: C2.1 C6.1 D7.2 R1.2
NetCs1_1: Cs1.1 Cs2.1 Cs3.1 Cs4.1 Lt_2.2 | length 498.2
  Top Layer w6: Cs1.1 Cs1.1@-719.68,-1055.32 ; -615,-1055.32 -612.74,-1053.06
  Top Layer w10: -612.74,-1053.06 Lt_2.2
  Top Layer w15: Cs1.1@-719.68,-1055.32 -615,-1055.32 Cs2.1 Cs3.1 Cs4.1
NetCs1_2: Cs1.2 D1.3
NetCs2_2: Cs2.2 D2.3
NetCs3_2: Cs3.2 D3.3
NetCs4_2: Cs4.2 D4.3
NetCs6_1: Cs6.1 Cs7.1 Cs8.1 Lt.2 | length 435.6
  Bottom Layer w15: Cs7.1 -335.04,-955.4 Cs6.1@-200.04,-955.49 ; Cs8.1@-335.04,-955.66 Cs6.1@-200.04,-955.66 ; Cs8.1 Lt.2@-335.04,-919.69
NetCs6_2: Cs6.2 D6.3
NetCs7_2: Cs7.2 D7.3
NetCs8_2: Cs8.2 D8.3
NetCt_1_2: Ct_1.2 Lt_1.1 SW1.5 | length 100.8
  Top Layer w6: Lt_1.1 Lt_1.1@-573.06,-833.52
  Top Layer w15: Lt_1.1@-573.06,-833.52 Ct_1.2 -527.74,-833.52 -507.44,-853.82 SW1.5
NetCt_2_1: Ct_2.1 Lt_2.1 SW1.8 | length 99.6
  Top Layer w6: Ct_2.1@-538.37,-948.2 Ct_2.1 ; SW1.8@-500.44,-930.59 SW1.8
  Top Layer w15: Lt_2.1 Ct_2.1@-538.37,-948.2 ; Ct_2.1 -517.74,-947.89 SW1.8@-500.44,-930.59
NetCY1_1: CY1.1 MSP430.46 Y1.2 | length 106.3
  Top Layer w6: CY1.1 -225,-1810 Y1.2 -182.09,-1767.09 MSP430.46
NetCY2_2: CY2.2 MSP430.45 Y1.1 | length 114.6
  Top Layer w6: CY2.2 -190,-1735.31 Y1.1 ; Y1.1@-195,-1739.57 -191.36,-1741.79 -182.17,-1747.4 MSP430.45
NetL1_2: L1.2 U2.20 | length 353.2
  Bottom Layer w10: 127.36,-1128.77 U2.20
  Bottom Layer w20: L1.2@59.96,-1290 59.96,-1275 127.36,-1207.6 127.36,-1128.77
NetLED1_1: LED1.1 R10.2 | length 32.3
  Top Layer w15: R10.2 LED1.1
NetLED2_1: LED2.1 R11.2 | length 32.6
  Top Layer w20: LED2.1 R11.2
NetLt_1_2: Lt_1.2 Q2.2 uP1.3 | length 140.5
  Top Layer w6: uP1.3@-670,-950 uP1.3@-650,-930
  Top Layer w10: uP1.3@-650,-930 -650,-890 -612.74,-852.74 Lt_1.2
NetMSP430_13: MSP430.13 P2.2 | length 214.5
  Top Layer w6: MSP430.13 146.46,-1806.46 175,-1835 290,-1835 P2.2
NetMSP430_14: MSP430.14 P2.1 | length 272.7
  Top Layer w6: MSP430.14 168.23,-1786.77 201.46,-1820 325,-1820 P2.1
NetMSP430_15: MSP430.15 P1.4 | length 93.5
  Top Layer w6: MSP430.15 177.09,-1767.09 190,-1780 P1.4
NetMSP430_16: MSP430.16 P1.3 | length 147.5
  Top Layer w6: MSP430.16 252.4,-1747.4 P1.3@275,-1770
NetR7_2: R7.2 U5.5 U5.6 | length 64.6
  Top Layer w6: U5.6 R7.2
  Top Layer w15: U5.5 U5.6
NetR8_2: R8.2 U5.3 | length 104.2
  Top Layer w6: U5.3 10.32,-1434.68 -5,-1450 -5,-1484.69 R8.2 R8.2@15,-1515.32
NetR16_1: R16.1 R17.2 U2.11 | length 140.1
  Bottom Layer w10: R17.2 -54.72,-820 0.28,-820 23.03,-842.76 U2.11
NetR17_1: R17.1 R18.2 U2.10 | length 67.1
  Bottom Layer w10: -42.64,-869.68 -26.38,-885.94 U2.10
  Bottom Layer w15: -42.64,-869.68 R17.1@-42.64,-849.37
NetR18_1: R18.1 R20.1 U2.8 | length 103.8
  Bottom Layer w6: R20.1 -82.01,-880 R18.1 R18.1@-36.69,-925.31
  Bottom Layer w10: R18.1@-36.69,-925.31 U2.8
NetR19_1: R19.1 R20.2 U2.7 | length 108.2
  Bottom Layer w6: R20.2 -87.64,-920 R19.1 -29.68,-959.68 -15,-945 U2.7
NetR21_1: R21.1 R22.2 U2.3 | length 311.4
  Bottom Layer w6: R22.2 R22.2@-72.32,-1059.69 ; R21.1 -42.01,-1125 52.05,-1125 62.4,-1114.65 U2.3
  Bottom Layer w15: R21.1 R22.2@-72.32,-1059.69
RF_RX: MSP430.39 U1.1 | length 724.8
  Top Layer w6: v3(-540,-1275) -272,-1543 -270.03,-1543 -183.74,-1629.29 MSP430.39
  Bottom Layer w6: U1.1 -593.86,-1221.14 v3(-540,-1275)
RF_TX: MSP430.33 Q1.3 | length 834.7
  Top Layer w6: v3(-160,-905) -160,-1070 -110,-1120 -110,-1476.06 -49.21,-1536.85 MSP430.33
  Bottom Layer w6: Q1.3@-230,-908.02 -227.98,-906 -156,-906 -155,-905 v3(-160,-905)
  Bottom Layer w15: Q1.3@-281.18,-908.02 Q1.3@-230,-908.02
RST: MSP430.23 R12.1 SBW1.2 | length 765.5
  Top Layer w6: MSP430.23 395.39,-1609.61 605,-1400 SBW1.2 779.69,-1400 R12.1
RX_EN: C5.1 MSP430.38 U1.5 | length 893
  Top Layer w6: v3(-435,-1275) -435,-1355 -241.5,-1548.5 -241.5,-1548.91 -207.49,-1582.92 -207.08,-1582.92 -180.39,-1609.61 MSP430.38
  Bottom Layer w6: U1.5@-595,-1055 -455,-1055 -434.43,-1075.57 -434.43,-1279.43 v3@-435,-1280
  Bottom Layer w15: U1.5 C5.1@-593.86,-1012.34
STAGE1: Cp1.1 Cp2.2 D1.2 D2.1
STAGE2: Cp2.1 Cp3.2 D2.2 D3.1
STAGE3: Cp3.1 Cp4.2 D3.2 D4.1
STAGE4: Cev.1 Cp4.1 D4.2 SW2.2 | length 138.6
  Top Layer w6: D4.2 D4.2@-319.02,-1195
  Top Layer w10: Cev.1 -244.92,-1214.76 SW2.2@-244.92,-1266.02
  Top Layer w15: D4.2@-319.02,-1195 Cev.1
SV: MSP430.32 SV.1 U2.13 U3.3 | length 1154.8
  Top Layer w6: MSP430.32 -29.53,-1535.47 -60,-1505 -60,-1365 30,-1275 v3(170,-1275) 170,-905 SV.1
  Bottom Layer w6: 62.4,-847.6 76,-834 209,-834 SV.1 ; U3.3 U3.3@170,-1231.97
  Bottom Layer w10: U2.13 62.4,-847.6 ; v3(170,-1275) U3.3@170,-1231.97
TB0: 8.1 MSP430.6 | length 1174.5
  Top Layer w6: 8.1@-250,-2910 -9.84,-2669.84 MSP430.6
TB1: 1.1 MSP430.1 | length 711.3
  Top Layer w6: 1.1 -410,-1870 -125,-1870 -108.27,-1853.27 MSP430.1 ; 1.1@-600,-2110 1.1@-555,-2110
TB2: 2.1 MSP430.4 | length 337.5
  Top Layer w6: 2.1@-200,-2110 -200,-2070 -49.21,-1919.21 MSP430.4
TB3: 3.1 MSP430.9 | length 337.5
  Top Layer w6: MSP430.9 49.21,-1919.21 200,-2070 3.1@200,-2110
TB4: *.1 MSP430.12 | length 629.1
  Top Layer w6: MSP430.12 173.27,-1900 430,-1900 600,-2070 *.1@600,-2110
TB5: 4.1 MSP430.2 | length 1068.6
  Top Layer w6: 4.1 -465,-2325 -465,-1980 -385,-1900 -110,-1900 -88.58,-1878.58 MSP430.2
TB6: 5.1 MSP430.5 | length 766.3
  Top Layer w6: 5.1@-250,-2510 -29.53,-2289.53 MSP430.5
TB7: 6.1 MSP430.8 | length 766.1
  Top Layer w6: 29.53,-2290 MSP430.8 ; 30,-2290 6.1@250,-2510
TB8: 0.1 MSP430.11 | length 1073.6
  Top Layer w6: MSP430.11 88.58,-1850.29 158.3,-1920 365,-1920 460,-2015 460,-2320 0.1 ; 0.1@600,-2510 0.1@600,-2465
TB9: 7.1 MSP430.3 | length 1475.8
  Top Layer w6: 7.1 -631.73,-2910 -440,-2718.27 -440,-2010 -360,-1930 -105,-1930 -68.9,-1893.9 MSP430.3
TB#: #.1 MSP430.10 | length 1438.7
  Top Layer w6: MSP430.10 68.9,-1863.9 140,-1935 350,-1935 435,-2020 435,-2695 #.1
TB*: 9.1 MSP430.7 | length 1174.5
  Top Layer w6: MSP430.7 9.84,-2669.84 9.1@250,-2910
TBCNTRL1: A.1 MSP430.43 | length 558.4
  Top Layer w6: A.1@-660,-1720 A.1 -615,-1675 -205,-1675 -171.97,-1708.03 MSP430.43 MSP430.43@-138.84,-1706
TBCNTRL2: B.1 MSP430.21 | length 488.5
  Top Layer w6: MSP430.21 538.98,-1648.98 B.1@600,-1710
TEST: MSP430.22 SBW1.3 | length 682.5
  Top Layer w6: MSP430.22 400.71,-1629.29 580,-1450 SBW1.3
UP/SPK_EN: MSP430.35 SW1.2 SW2.4 | length 985.1
  Top Layer w6: SW2.4@-270.51,-1334.92 -270.51,-1379.49 -230,-1420 -136.04,-1420 ; SW1.2 -280,-905 -296.56,-921.56 -296.56,-1018.44 -210,-1105 -175,-1105 -136.04,-1143.96 -136.04,-1483.96 -90,-1530 MSP430.35@-90,-1561.38
UP_OUT: MSP430.17 P1.2 | length 208.6
  Top Layer w6: MSP430.17 287.72,-1727.72 325,-1765 P1.2@325,-1770
UPLINK_SR: Q2.3 UPLINK_SECURITY.1 | length 635.1
  Top Layer w6: UPLINK_SECURITY.1@-770,-1360 -819.75,-1310.25 -819.75,-900 -779.75,-860 -733.02,-860
  Top Layer w10: Q2.3@-733.02,-891.14 -733.02,-860 Q2.3@-733.02,-839.96
VBAT: C12.2 U2.18 | length 67.6
  Bottom Layer w6: C12.2@187.05,-925.31 C12.2
  Bottom Layer w10: U2.18 C12.2@187.05,-925.31
VDD_UP: MSP430.18 P1.1 | length 263.9
  Top Layer w6: MSP430.18 313.03,-1708.03 P1.1@375,-1770
VMEAS: MSP430.19 R8.1 R9.2 | length 420.8
  Top Layer w6: R8.1 145,-1510 v3(200,-1565) ; R9.2@59.68,-1475.32 R9.2 ; MSP430.19 138.46,-1690 165,-1690 165.04,-1690.04 214.96,-1690.04 v3(230,-1675)
  Top Layer w15: R8.1 R9.2@59.68,-1475.32
  Bottom Layer w6: v3(200,-1565) 230,-1595 v3(230,-1675)
VRECT: C10.1 C24.2 C25.2 D8.2 L1.1 U2.2 Vrect.2 | length 1001.7
  Bottom Layer w6: C25.2 C24.2
  Bottom Layer w10: 82.09,-1130.32 U2.2
  Bottom Layer w20: L1.1@54.75,-1157.66 82.09,-1130.32
  Bottom Layer w25: Vrect.2@-655,-1360 -450.04,-1360 -355.04,-1265 ; -400,-1219.96 -400,-1175 -395.04,-1170.04 -395.04,-1145 ; -395.04,-1225 -355.04,-1265 ; L1.1@-74.51,-1169.39 -170.13,-1265 -355.04,-1265
VREF_SAMP: C26.2 R24.1 R25.2 U2.4 | length 106.8
  Bottom Layer w6: R24.1 R25.2 42.72,-1054.02 U2.4
VREG: C8.2 C11.2 MSP430.37 MSP430.48 R12.2 SBW1.4 T3.1 U3.5 | length 637.7
  Top Layer w6: v2(-175,-1840) v2@-170.35,-1840 ; SBW1.4 769.69,-1500 R12.2
  Top Layer w10: C11.2@-168.92,-1556.4 MSP430.37@-140.39,-1584.92
  Top Layer w25: v2@-211.42,-1538.58 -195,-1555 C11.2@-170,-1555 ; v2@-170.35,-1840 -145.35,-1815 -135,-1815
  Bottom Layer w6: T3.1@355,-1110 T3.1 410,-1125
  Bottom Layer w15: U3.5 247.01,-1139.69 355.31,-1139.69 T3.1 ; T3.1@355,-1110 v3(355,-1030)
  Bottom Layer w20: T3.1 420,-1075 v3(420,-1030) ; 410,-1125 v3(445,-1125)
  other v2: -210,-1540
VSIG: C6.2 R1.1 R2.2 T1.1 U1.3 | length 481.6
  Bottom Layer w6: T1.1 T1.1@-740.35,-1107.34 ; R1.1@-475.35,-1210.32 R1.1
  Bottom Layer w10: U1.3 -645.45,-1122.87 -645.45,-1106.92 -623.53,-1085 -585,-1085 -560,-1110 -560,-1205.6 -529.6,-1236 -500.48,-1236 R1.1@-475.35,-1210.87 ; R1.1@-475,-1210.52 R1.1@-475,-1200
  Bottom Layer w15: R2.2 -664.92,-1122.46 U1.3
  Bottom Layer w20: R1.1@-475.35,-1210.87 C6.2
  Bottom Layer w25: T1.1@-740.35,-1107.34 R2.2
VSTORE: C21.2 C22.2 C27.2 R7.1 R21.2 R24.2 SW2.6 T4.1 U2.19 U3.1 U3.4 U5.4 | length 1582.5
  Top Layer w6: v3(-220,-1390) -220,-1335.59 SW2.6@-219.33,-1334.92 ; v5(-85,-1390) -85,-1340 -37.64,-1292.64 v3(-37.64,-1059.68) ; U5.4 R7.1@105,-1434.68 ; R7.1 260.31,-1434.68 v3(305,-1390) v2(305,-1230)
  Bottom Layer w6: v3(-220,-1390) v3(305,-1390) v3@300,-1395 ; R21.2@-37.64,-1090 R21.2
  Bottom Layer w10: R21.2@-37.64,-1090 v3(-37.64,-1059.68) ; U2.19 182.99,-945 C22.2
  Bottom Layer w20: U3.4 244.76,-1212.24 U3.1
pads on no net: MSP430.20 MSP430.25 MSP430.26 MSP430.27 MSP430.28 MSP430.29 MSP430.30 MSP430.42 SPK1.1 SPK1.4 SW2.5 TF1.2 TF1.5 U2.12 U2.14 U2.16 Y1.

## Polygon pours and split planes (outlines as drawn)
GND on Top Layer "Top-layer-GND" (hatched 90Degree grid 20 track 8, pour order 8): -836.25,-3010.19 -835,-3008.73 -835,-1275 833.75,-1275 833.75,-3004.37 833.75,-3016.01 833.75,-3021.84 833.75,-3039.3 768.55,-3115 -740.97,-3115 -745.98,-3115 -836.25,-3010.19
GND on Bottom Layer "Bottom-layer-GND" (solid, pour order 7): -835.4,-2979.59 -834.15,-2977.71 -834.15,-737.8 837.06,-737.8 837.06,-2972.07 837.06,-2987.11 837.06,-2994.64 837.06,-3017.2 771.77,-3115 -739.98,-3115 -745,-3115 -835.4,-2979.59
VREG on Mid-Layer 1 "Mid-layer-Vreg" (solid, pour order 11): -250,-1537.02 -250,-990 -244.05,-996.44 815,-996.44 815,-1537.02 -250,-1537.02
VREG on Mid-Layer 1 "Mid-layer-Vreg" (solid, pour order 12): -250,-1875 -250,-1500 -249.39,-1504.41 -140,-1504.41 -140,-1875 -250,-1875
GND on Mid-Layer 2 "Mid-layer-Gnd" (solid, pour order 9): -435,-1925 -435,-1500 -430,-1505 460,-1505 460,-1925 -435,-1925
GND on Mid-Layer 2 "Mid-layer-Gnd" (solid, pour order 10): -840,-1537.02 -840,-725 -830.53,-734.55 855,-734.55 855,-1537.02 -840,-1537.02

## Keep-outs
Keep-Out Layer:
  lines w10: 840.3,-6454.7 ccw(c840.3,-6350) 945,-6350 ; -833.75,-2982.13 ccw(c-703.08,-2982.13) -703.08,-3112.8 750,-3112.8 ccw(c750,-2985.76) 877.03,-2985.76 877.03,-17.03 865,-5 -815,-5 -833.75,-23.75 -833.75,-2982.13

## Other copper
Top Layer:
  rectangle net NetCs4_2: -370,-1110 -315,-1085
  rectangle net NetCs3_2: -505,-1110 -450,-1085
  rectangle net NetCs2_2: -630,-1110 -575,-1085
  rectangle net NetCs1_2: -760,-1110 -705,-1085
  rectangle net GND: -800,-1250 -760,-1175
  rectangle net STAGE4: -350,-1250 -310,-1175
  rectangle net STAGE3: -480,-1250 -370,-1175
  rectangle net STAGE2: -610,-1250 -500,-1175
  rectangle net STAGE1: -740,-1250 -630,-1175
  region net GND: -805,-925 -805,-975 -695,-975 -695,-925
  rectangle net GND: -545,-915 -453.06,-873.2
Bottom Layer:
  region net VSTORE: 202.36,-1020 155,-1020 155,-1155 202.36,-1155
  rectangle net GND: -350.04,-1225 -180.04,-1175
  region net VSTORE: 365,-1215 235,-1215 235,-1250 365,-1250
  region net GND: 247.36,-905 222.36,-905 222.36,-984.68 247.36,-984.68
  region net GND: 277.36,-964.68 222.36,-964.68 222.36,-1089.68 277.36,-1089.68
  region net GND: 22.36,-964.68 -7.64,-964.68 -7.64,-999.68 22.36,-999.68
  region net VSTORE: 7.36,-1084.68 -42.64,-1084.68 -42.64,-1104.68 7.36,-1104.68
  region net GND: 7.36,-964.68 -12.64,-964.68 -12.64,-1069.68 7.36,-1069.68
  rectangle net NetC2_1: -525.04,-1225 -505.04,-1130
  region net VSTORE: 202.36,-945 177.36,-945 177.36,-994.68 202.36,-994.68
  region net VREF_SAMP: 47.36,-1014.68 27.36,-1014.68 27.36,-1104.68 47.36,-1104.68
  region net VSTORE: 202.36,-969.68 147.36,-969.68 147.36,-1094.68 202.36,-1094.68
  rectangle net GND: -355.04,-1225 -335.04,-1175
  rectangle net VRECT: -415.04,-1225 -375.04,-1080
  rectangle net NetCs7_2: -505.04,-1005 -455.04,-985
  rectangle net GND: -220.04,-1225 -180.04,-1080
  rectangle net NetC2_1: -545.04,-1155 -505.04,-1080
  rectangle net GND: -485.04,-1155 -445.04,-1080
  rectangle net NetCs6_2: -245.04,-1005 -190.04,-985
  rectangle net NetCs8_2: -375.04,-1005 -325.04,-985
  rectangle net NetC1_1: -355.04,-1155 -240.04,-1080

## Silkscreen, mask and mechanical layers (free items; w line width, h text height)
Top Overlay:
  rectangle: -145,-1205 380,-1045
  text "UW Battery-free Cellphone" at -735,-655 h75
  text "Tag #" at -65,-1000 h75
Bottom Overlay:
  text "Revision 4.0" at 315,-2410 h75
  text "Battery-free Cellphone" at 635,-2525 h75
  text "Sensor Systems Group, UW" at 760,-2660 h75